# Altium PCB ThreePhaseMLI.PcbDoc (part 3 of 3)
Units mm, origin at the board's own origin, x right, y up, seen from the top; angles counter-clockwise.
Board outline 158.68 x 188.03 mm, 2 copper layers (Top Layer, Bottom Layer); 228 components, 175 nets, 606 pads, 93 vias.
Unrouted connection lines stored in the file: 12.
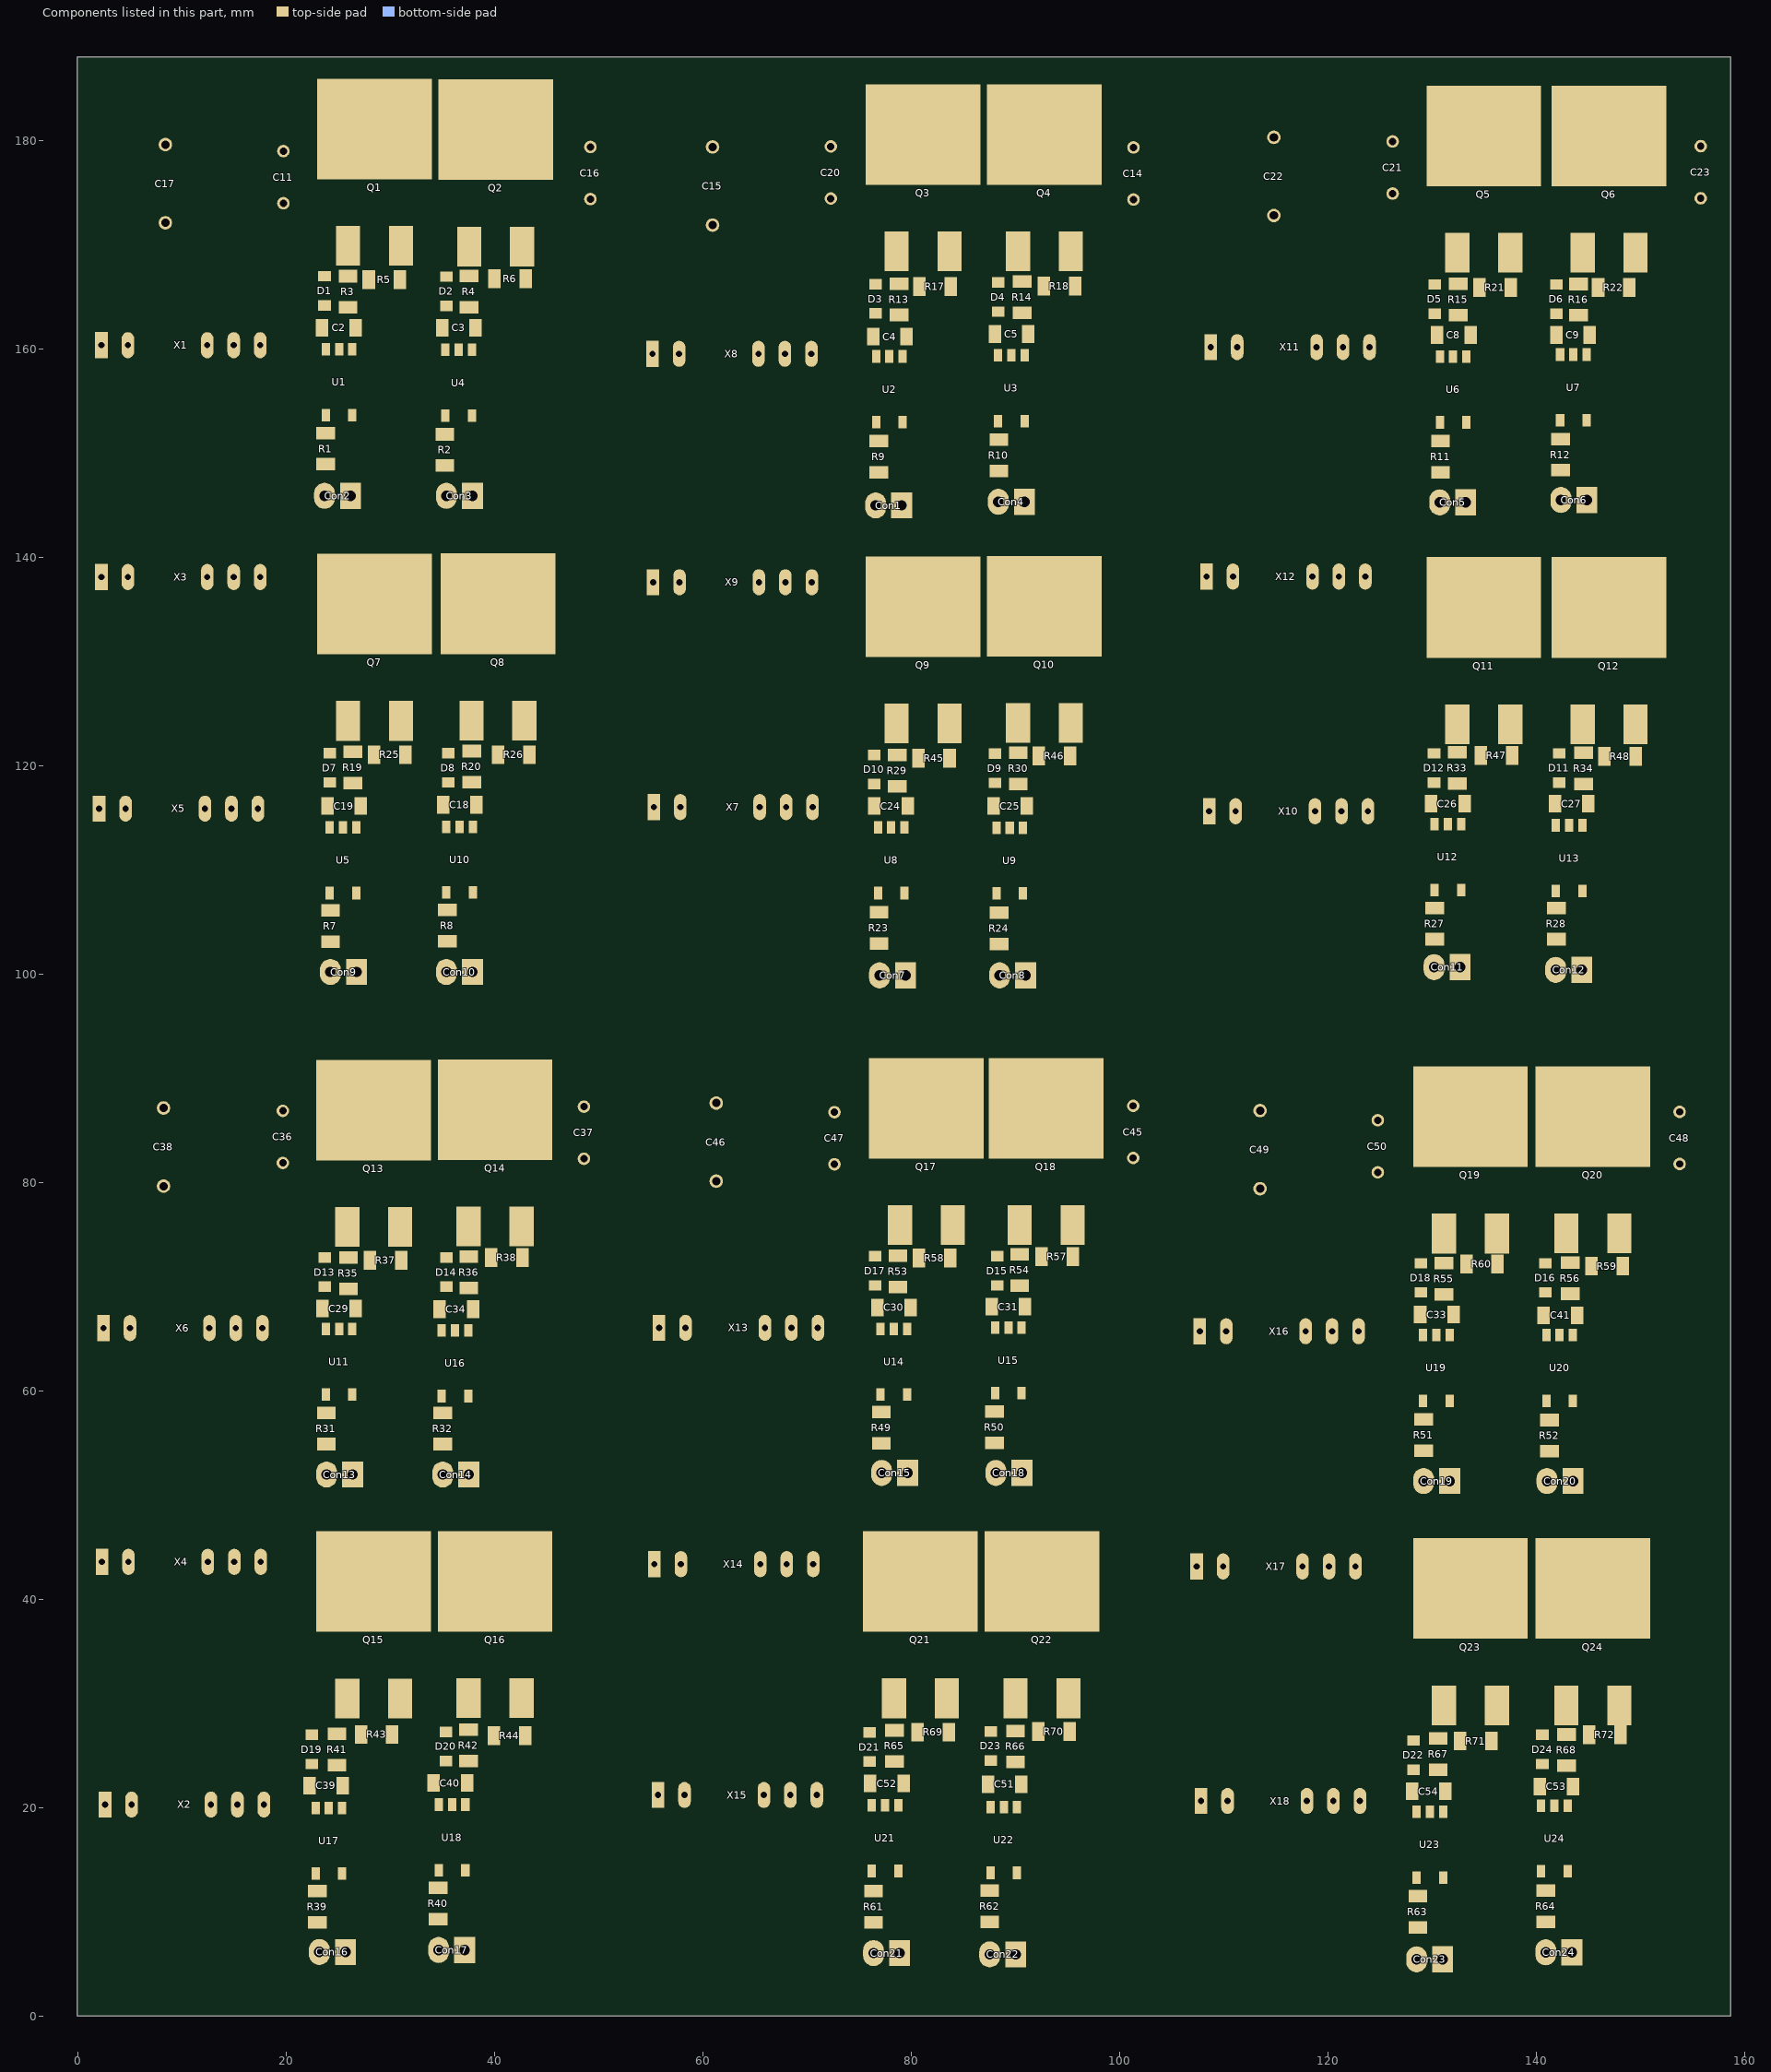
[diagram p2: the components of this part, seen from the top]

## Polygon pours and split planes (outlines as drawn) (continued)
NetCon10_1 on Top Layer "NETCON10_1_L01_P025" (solid, pour order 25): 36.955,108.547 39.23,108.547 39.23,98.645 36.955,98.645
NetCon9_1 on Top Layer "NETCON9_1_L01_P024" (solid, pour order 24): 25.75,108.702 28.025,108.702 28.025,98.8 25.75,98.8
NetCon9_2 on Top Layer "NETCON9_2_L01_P023" (solid, pour order 23): 22.823,103.902 25.279,103.902 25.433,103.748 25.433,98.8 22.823,98.8
NetR7_2 on Top Layer "NETR7_2_L01_P022" (solid, pour order 22): 22.99,108.7 25.446,108.7 25.6,108.546 25.6,105.25 22.99,105.25
NetD8_1 on Top Layer "NETD8_1_L01_P021" (solid, pour order 21): 36.225,113.446 36.225,117.539 34.439,117.539 34.439,118.948 34.589,119.098 38.789,119.098 38.789,117.539 37.326,117.539 37.326,113.463
NetD7_1 on Top Layer "NETD7_1_L01_P020" (solid, pour order 20): 25.025,113.445 25.025,117.539 23.339,117.539 23.339,118.948 23.489,119.098 27.55,119.098 27.55,117.539 26.062,117.539 26.062,113.46
+15v2 on Top Layer "+15V2_L01_P019" (solid, pour order 19): 16.53,112.45 35.95,112.45 35.95,117.2 35.85,117.2 35.65,117.2 34.416,117.2 34.425,116.54 34.425,113.125 24.65,113.125 24.65,113.425 24.65,117.2 16.5,117.2
NetD7_2 on Top Layer "NETD7_2_L01_P018" (solid, pour order 18): 22.925,126.563 29.15,126.563 29.225,126.488 29.225,119.913 22.9,119.913
no net on Top Layer "NONET_L01_P016" (solid, pour order 16): 11.45,136.65
NetD2_1 on Top Layer "NETD2_1_L01_P015" (solid, pour order 15): 36.1,159.214 36.1,163.339 36.066,163.305 34.2,163.305 34.2,164.714 34.35,164.864 38.55,164.864 38.55,163.305 37.088,163.305 37.088,159.229
1 on Top Layer "1_L01_P014" (solid, pour order 14): 34.65,130.425 34.575,130.35 34.575,129.35 34.575,128.475 52.425,128.475 52.425,172.2 41.35,172.2 41.275,172.275 41.25,167.775 41.25,144.9 39.4,143.05 34.65,143.05 34.65,138.9
NetD2_2 on Top Layer "NETD2_2_L01_P013" (solid, pour order 13): 34.466,172.238 40.691,172.238 40.766,172.163 40.766,165.588 34.441,165.588
NetCon2_1 on Top Layer "NETCON2_1_L01_P012" (solid, pour order 12): 27.55,154.65 27.55,144.35 25.3,144.35 25.3,154.65
NetCon2_2 on Top Layer "NETCON2_2_L01_P011" (solid, pour order 11): 22.475,149.8 24.65,149.8 24.8,149.65 24.8,144.35 24.5,144.35 22.475,144.35
NetR1_2 on Top Layer "NETR1_2_L01_P010" (solid, pour order 10): 22.5,154.65 24.675,154.65 25.025,154.3 25.025,151.175 22.55,151.175 22.475,151.25
gnd_ on Top Layer "GND__L01_P009" (solid, pour order 9): 32.45,141.075 33.972,141.075 33.972,140.847 33.972,130.375 32.45,130.375 29.714,130.375 22.35,130.375 22.3,130.425 22.325,130.45 22.325,141.075 29.702,141.075 29.664,172.082 32.45,172.075
NetD1_1 on Top Layer "NETD1_1_L01_P006" (solid, pour order 6): 24.575,159.35 24.575,163.475 24.541,163.441 22.675,163.441 22.675,164.85 22.825,165 27.025,165 27.025,163.441 25.562,163.441 25.562,159.365
-5v on Top Layer "-5V_L01_P005" (solid, pour order 5): 25.953,158.928 25.3,158.275 13.65,158.275 13.65,161.325 12.825,162.15 11.3,162.15 11.3,157.275 11.775,156.8 27.55,156.8 27.55,159.2 27.55,163.05 25.953,163.05
+15v on Top Layer "+15V_L01_P004" (solid, pour order 4): 24.35,158.925 24.35,163.1 16.675,163.1 16.675,158.925
NetD1_2 on Top Layer "NETD1_2_L01_P003" (solid, pour order 3): 22.425,172.15 28.65,172.15 28.725,172.075 28.725,165.5 22.4,165.5
12v on Top Layer "12V_L01_P000" (solid, pour order 0): 50.475,188.05 50.45,188.025 -0.025,188.025 -0.025,114.975 -0.05,114.95 0.775,114.125 3.025,114.125 3.025,176.95 3,176.975 3.625,177.6 50.425,177.6
no net on Bottom Layer "NONET_L02_P248" (solid, pour order 248): 25.103,147.355 27.628,147.355 27.628,144.555 27.428,144.355 27.403,144.38 25.103,144.38
NetCon2_2 on Bottom Layer "NETCON2_2_L02_P247" (solid, pour order 247): 22.325,147.25 24.85,147.25 24.85,144.45 24.65,144.25 24.625,144.275 22.325,144.275
3 on Bottom Layer "3_L02_P246" (solid, pour order 246): 120.114,136.493 120.114,142.918 120.139,142.943 143.376,142.943 143.376,141.431 143.314,141.368 143.264,141.418 122.314,141.418 122.314,136.618 122.089,136.393
2 on Bottom Layer "2_L02_P245" (solid, pour order 245): 66.914,136.093 66.914,142.518 66.939,142.543 90.176,142.543 90.176,141.031 90.114,140.968 90.064,141.018 69.114,141.018 69.114,136.218 68.889,135.993
1 on Bottom Layer "1_L02_P244" (solid, pour order 244): 14,136.75 14,143.175 14.025,143.2 37.262,143.2 37.262,141.687 37.2,141.625 37.15,141.675 16.2,141.675 16.2,136.875 15.975,136.65
-5v14 on Bottom Layer "-5V14_L02_P227" (solid, pour order 227): 134.357,110.284 134.332,110.309 134.332,117.134 136.032,117.134 136.057,117.109 136.057,110.109 134.407,110.109 134.332,110.184
-5v17 on Bottom Layer "-5V17_L02_P225" (solid, pour order 225): 132.514,15.72 132.489,15.745 132.489,22.57 134.189,22.57 134.214,22.545 134.214,15.545 132.564,15.545 132.489,15.62
-5v11 on Bottom Layer "-5V11_L02_P224" (solid, pour order 224): 80.314,16.75 80.314,23.302 82.014,23.302 82.039,23.277 82.039,16.75
-5v5 on Bottom Layer "-5V5_L02_P223" (solid, pour order 223): 26.839,16.6 26.839,22.502 28.539,22.502 28.564,22.477 28.564,16.6
+15v16 on Bottom Layer "+15V16_L02_P182" (solid, pour order 182): 122.361,45.113 148.236,45.113 148.236,62.438 147.311,63.363 138.5,63.363 138.5,66.213 150.911,66.213 151.948,65.175 151.948,42.025 151.361,41.438 122.036,41.438 122.036,45.113
+15v10 on Bottom Layer "+15V10_L02_P181" (solid, pour order 181): 70.036,45.738 95.911,45.738 95.911,63.063 94.986,63.988 85.761,63.988 85.761,66.45 85.761,66.725 85.761,66.838 98.586,66.838 99.623,65.8 99.623,42.65 99.036,42.063 69.711,42.063 69.711,45.738
+15v4 on Bottom Layer "+15V4_L02_P180" (solid, pour order 180): 16.836,45.563 42.711,45.563 42.711,62.888 41.786,63.813 32.561,63.813 32.561,66.276 32.561,66.55 32.561,66.663 45.386,66.663 46.423,65.625 46.423,42.475 45.836,41.888 16.511,41.888 16.511,45.563
gnd17 on Bottom Layer "GND17_L02_P133" (solid, pour order 133): 23 vertices, not listed, extent 108.746,18.237 154.85,82.312
gnd11 on Bottom Layer "GND11_L02_P132" (solid, pour order 132): 23 vertices, not listed, extent 56.696,18.6 104.021,83.062
-5v16 on Bottom Layer "-5V16_L02_P131" (solid, pour order 131): 145.925,63.102 145.925,61.427 118.471,61.427 118.471,41.377 116.471,41.422 116.471,63.102
-5v10 on Bottom Layer "-5V10_L02_P130" (solid, pour order 130): 93.571,63.327 93.571,61.652 66.446,61.652 66.446,41.602 64.446,41.647 64.446,63.327
-5v4 on Bottom Layer "-5V4_L02_P129" (solid, pour order 129): 40,63.752 40,62.077 13.421,62.077 13.421,42.027 11.421,42.072 11.421,63.752
3 on Bottom Layer "3_L02_P128" (solid, pour order 128): 119.464,64.572 119.464,70.122 137.839,70.122 137.839,68.147 121.364,68.147 121.364,64.122 119.464,64.122
2 on Bottom Layer "2_L02_P127" (solid, pour order 127): 67.539,64.897 67.539,70.447 85.914,70.447 85.914,68.472 69.439,68.472 69.439,64.447 67.539,64.447
1 on Bottom Layer "1_L02_P126" (solid, pour order 126): 14.314,65.047 14.314,70.597 32.689,70.597 32.689,68.622 16.214,68.622 16.214,64.597 14.314,64.597
gnd5 on Bottom Layer "GND5_L02_P125" (solid, pour order 125): 22 vertices, not listed, extent 3.875,18.75 49.775,83.225
12v_5 on Bottom Layer "12V_5_L02_P121" (solid, pour order 121): 108.216,18.775 105.191,18.775 105.191,95 154.85,95 154.85,84.525 108.841,84.525 108.216,83.9
12v_3 on Bottom Layer "12V_3_L02_P120" (solid, pour order 120): 56.291,18.6 53.266,18.6 53.266,94.825 103.791,94.825 103.791,84.35 56.916,84.35 56.291,83.725
12v_1 on Bottom Layer "12V_1_L02_P119" (solid, pour order 119): 3.366,18.975 -0.025,18.975 -0.025,94.325 49.775,94.325 49.775,83.85 3.991,83.85 3.366,83.225
-5v8 on Bottom Layer "-5V8_L02_P104" (solid, pour order 104): 80.825,110.05 80.8,110.075 80.8,116.9 82.5,116.9 82.525,116.875 82.525,109.875 80.875,109.875 80.8,109.95
gnd12 on Bottom Layer "GND12_L02_P083" (solid, pour order 83): 120.654,159.011 120.654,164.561 139.029,164.561 139.029,162.586 122.554,162.586 122.554,158.561 120.654,158.561
+15v13 on Bottom Layer "+15V13_L02_P082" (solid, pour order 82): 123.149,140.023 149.024,140.023 149.024,157.348 148.099,158.273 138.874,158.273 138.874,160.736 138.874,161.011 138.874,161.123 151.699,161.123 152.736,160.086 152.736,136.936 152.149,136.348 122.824,136.348 122.824,140.023
-5v13 on Bottom Layer "-5V13_L02_P081" (solid, pour order 81): 147.125,158.175 147.125,156.5 119.582,156.5 119.582,136.401 117.582,136.446 117.582,158.175
gnd14 on Bottom Layer "GND14_L02_P080" (solid, pour order 80): 22 vertices, not listed, extent 110.15,114.1 157.84,175.983
12v_4 on Bottom Layer "12V_4_L02_P079" (solid, pour order 79): 109.45,113.987 106.819,113.987 106.819,187.912 157.344,187.912 157.344,177.437 110.469,177.437 109.45,176.418
+15v7 on Bottom Layer "+15V7_L02_P072" (solid, pour order 72): 69.787,139.431 95.662,139.431 95.662,156.756 94.737,157.681 85.675,157.681 85.675,160.531 98.337,160.531 99.375,159.494 99.375,136.344 98.787,135.756 69.462,135.756 69.462,139.431
-5v7 on Bottom Layer "-5V7_L02_P046" (solid, pour order 46): 93.519,157.275 93.519,155.65 66.394,155.65 66.394,135.878 64.394,135.923 64.394,157.275
gnd6 on Bottom Layer "GND6_L02_P045" (solid, pour order 45): 67,158.575 67,164.125 85.375,164.125 85.375,162.15 68.9,162.15 68.9,158.125 67,158.125
gnd8 on Bottom Layer "GND8_L02_P044" (solid, pour order 44): 23 vertices, not listed, extent 56.9,114.25 104.225,175.425
12v_2 on Bottom Layer "12V_2_L02_P042" (solid, pour order 42): 56.325,114.064 53.225,114.064 53.225,187.989 104.124,187.989 104.124,177.514 57.249,177.514 56.325,176.59
-5v2 on Bottom Layer "-5V2_L02_P040" (solid, pour order 40): 28.375,110.375 28.35,110.4 28.35,117.225 30.05,117.225 30.075,117.2 30.075,110.2 28.425,110.2 28.35,110.275
+15v1 on Bottom Layer "+15V1_L02_P038" (solid, pour order 38): 16.925,139.925 42.8,139.925 42.8,157.25 41.875,158.175 32.65,158.175 32.65,160.638 32.65,160.913 32.65,161.025 45.475,161.025 46.512,159.988 46.512,136.837 45.925,136.25 16.6,136.25 16.6,139.925
-5v1 on Bottom Layer "-5V1_L02_P017" (solid, pour order 17): 40.5,158.075 40.5,156.4 13.375,156.4 13.375,136.35 11.375,136.395 11.375,158.075
gnd_ on Bottom Layer "GND__L02_P008" (solid, pour order 8): 14,159.35 14,164.9 32.375,164.9 32.375,162.925 15.9,162.925 15.9,158.9 14,158.9
GND on Bottom Layer "GND_L02_P002" (solid, pour order 2): 23 vertices, not listed, extent 3.25,114.1 50.575,175.275
12v on Bottom Layer "12V_L02_P001" (solid, pour order 1): 3,114.1 -0.025,114.1 -0.025,188.025 50.5,188.025 50.5,177.55 3.625,177.55 3,176.925

## Silkscreen, mask and mechanical layers (free items; w line width, h text height)
Mechanical 1:
  the board outline again, w0.254